# Altium PCB Microphone_Module_PCB_14-8-21.PcbDoc (part 1 of 2)
Units mm, origin at the board's own origin, x right, y up, seen from the top; angles counter-clockwise.
Board outline 220 x 220 mm, 4 copper layers (Top Layer, Layer 3, Layer 4, Bottom Layer), stack 0.683 mm thick; 104 components, 72 nets, 396 pads, 233 vias.
Unrouted connection lines stored in the file: 15.
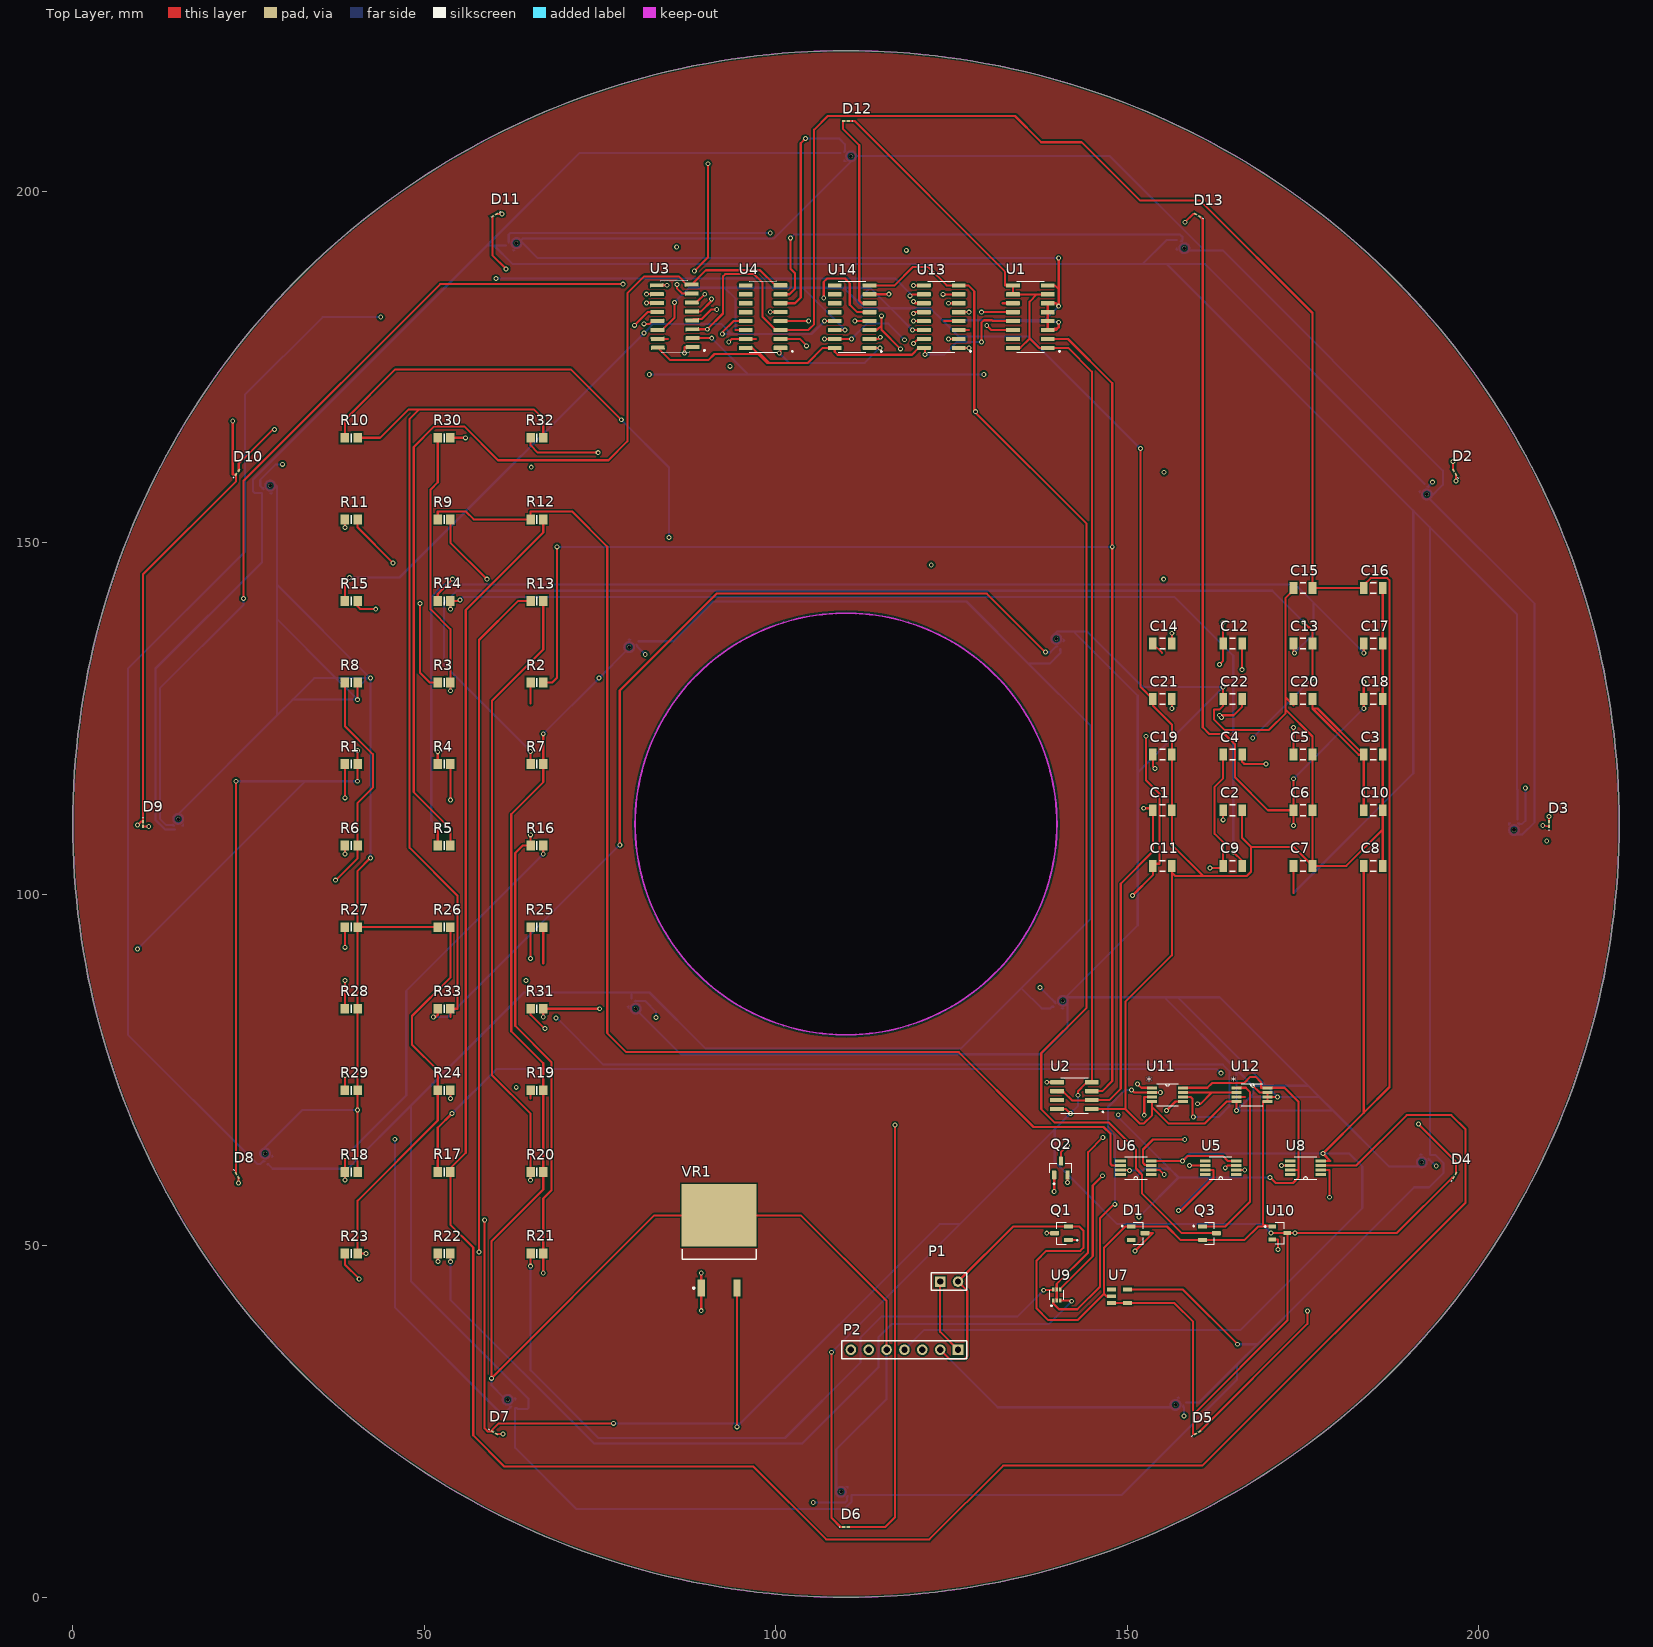
[diagram p0: Top Layer view]
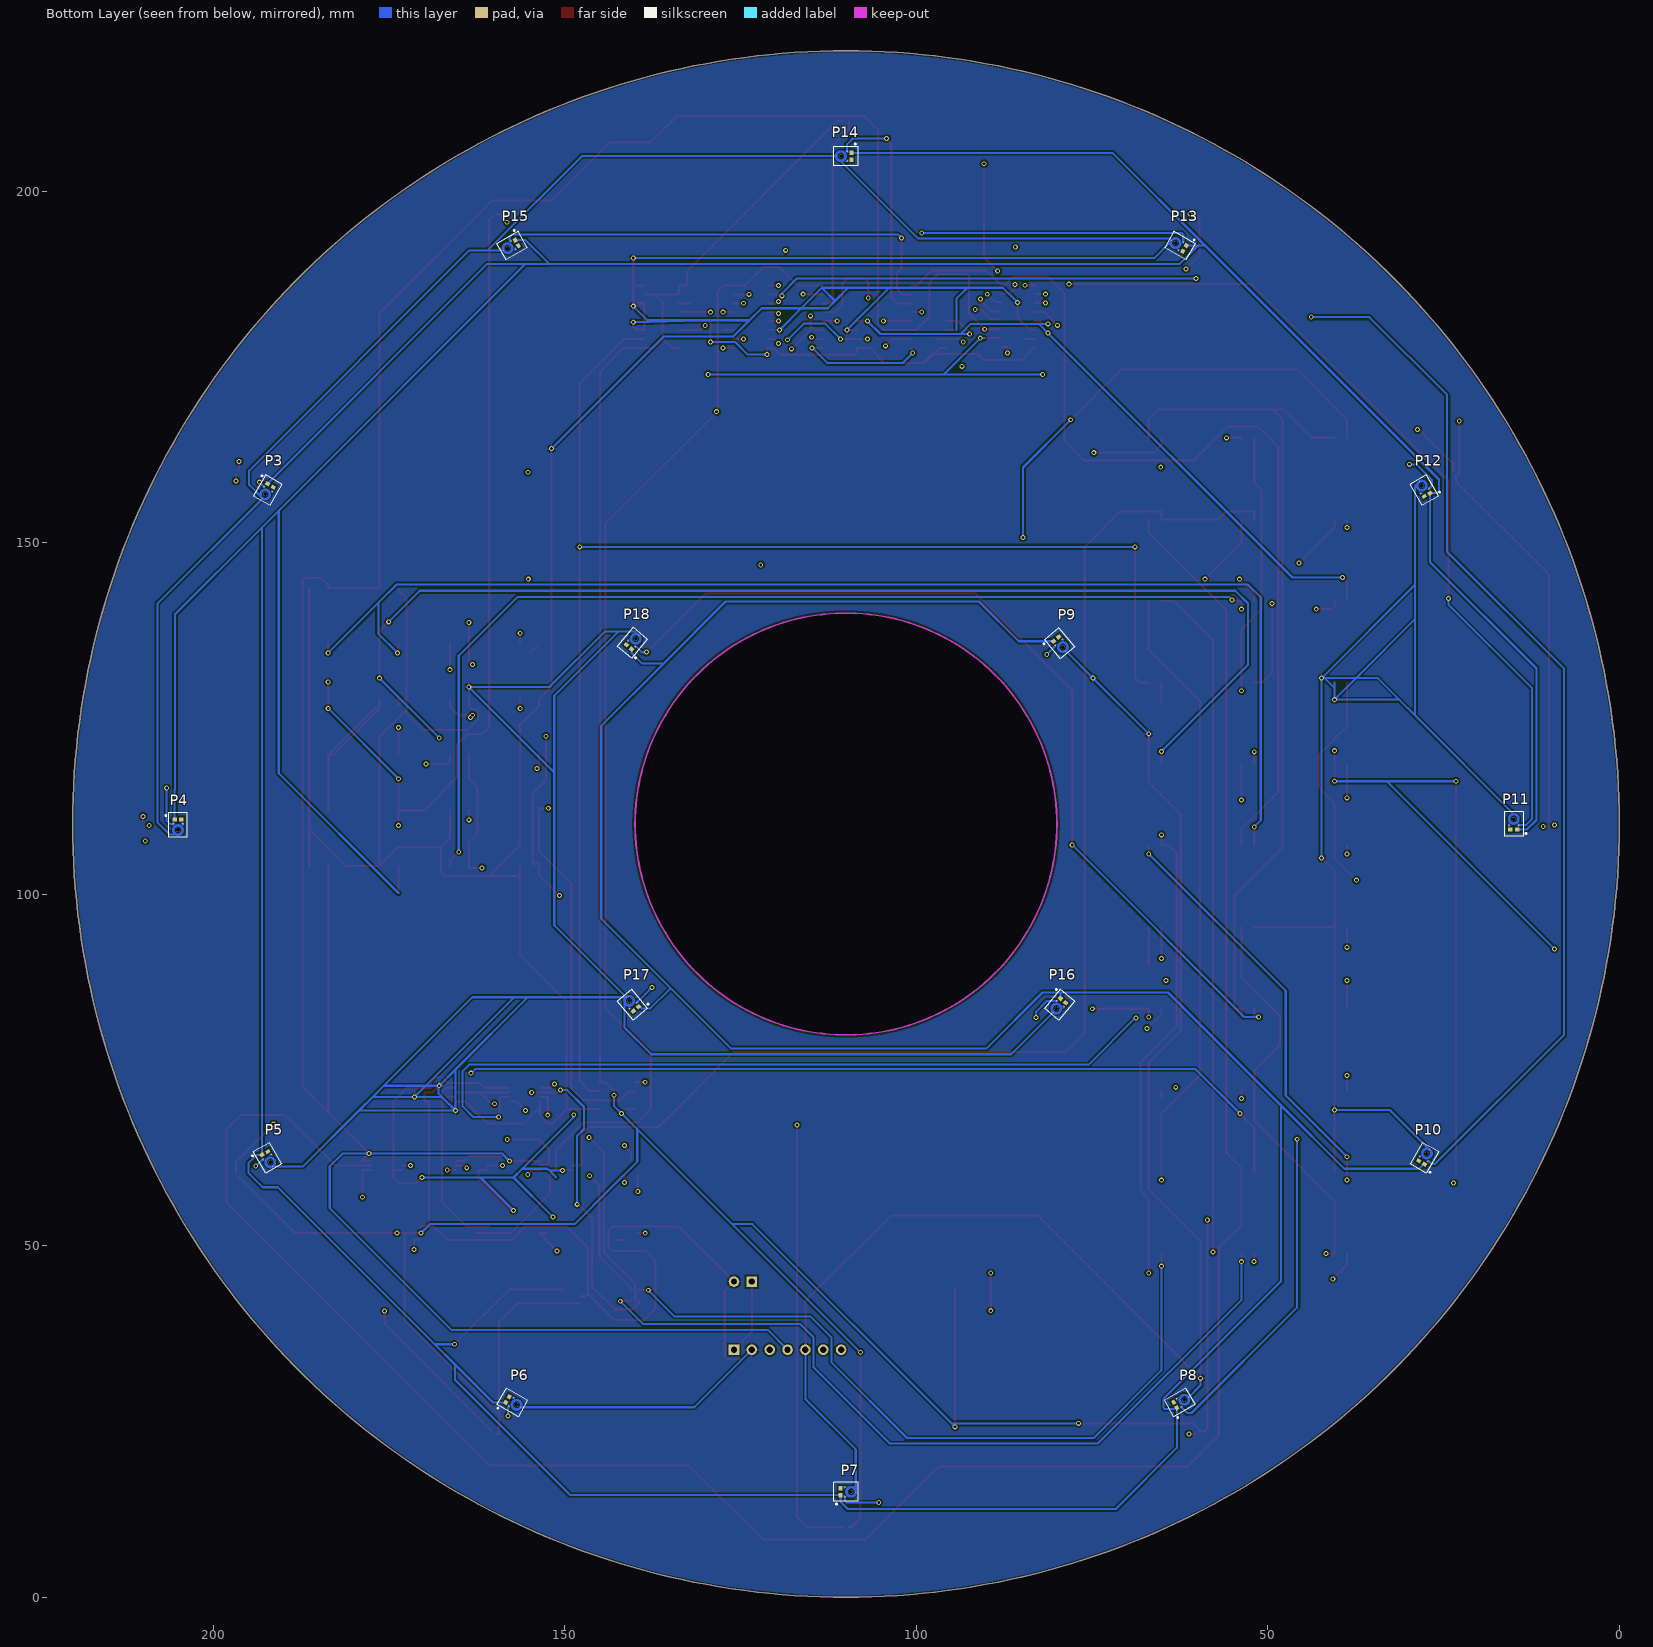
[diagram p1: Bottom Layer view, seen from below]
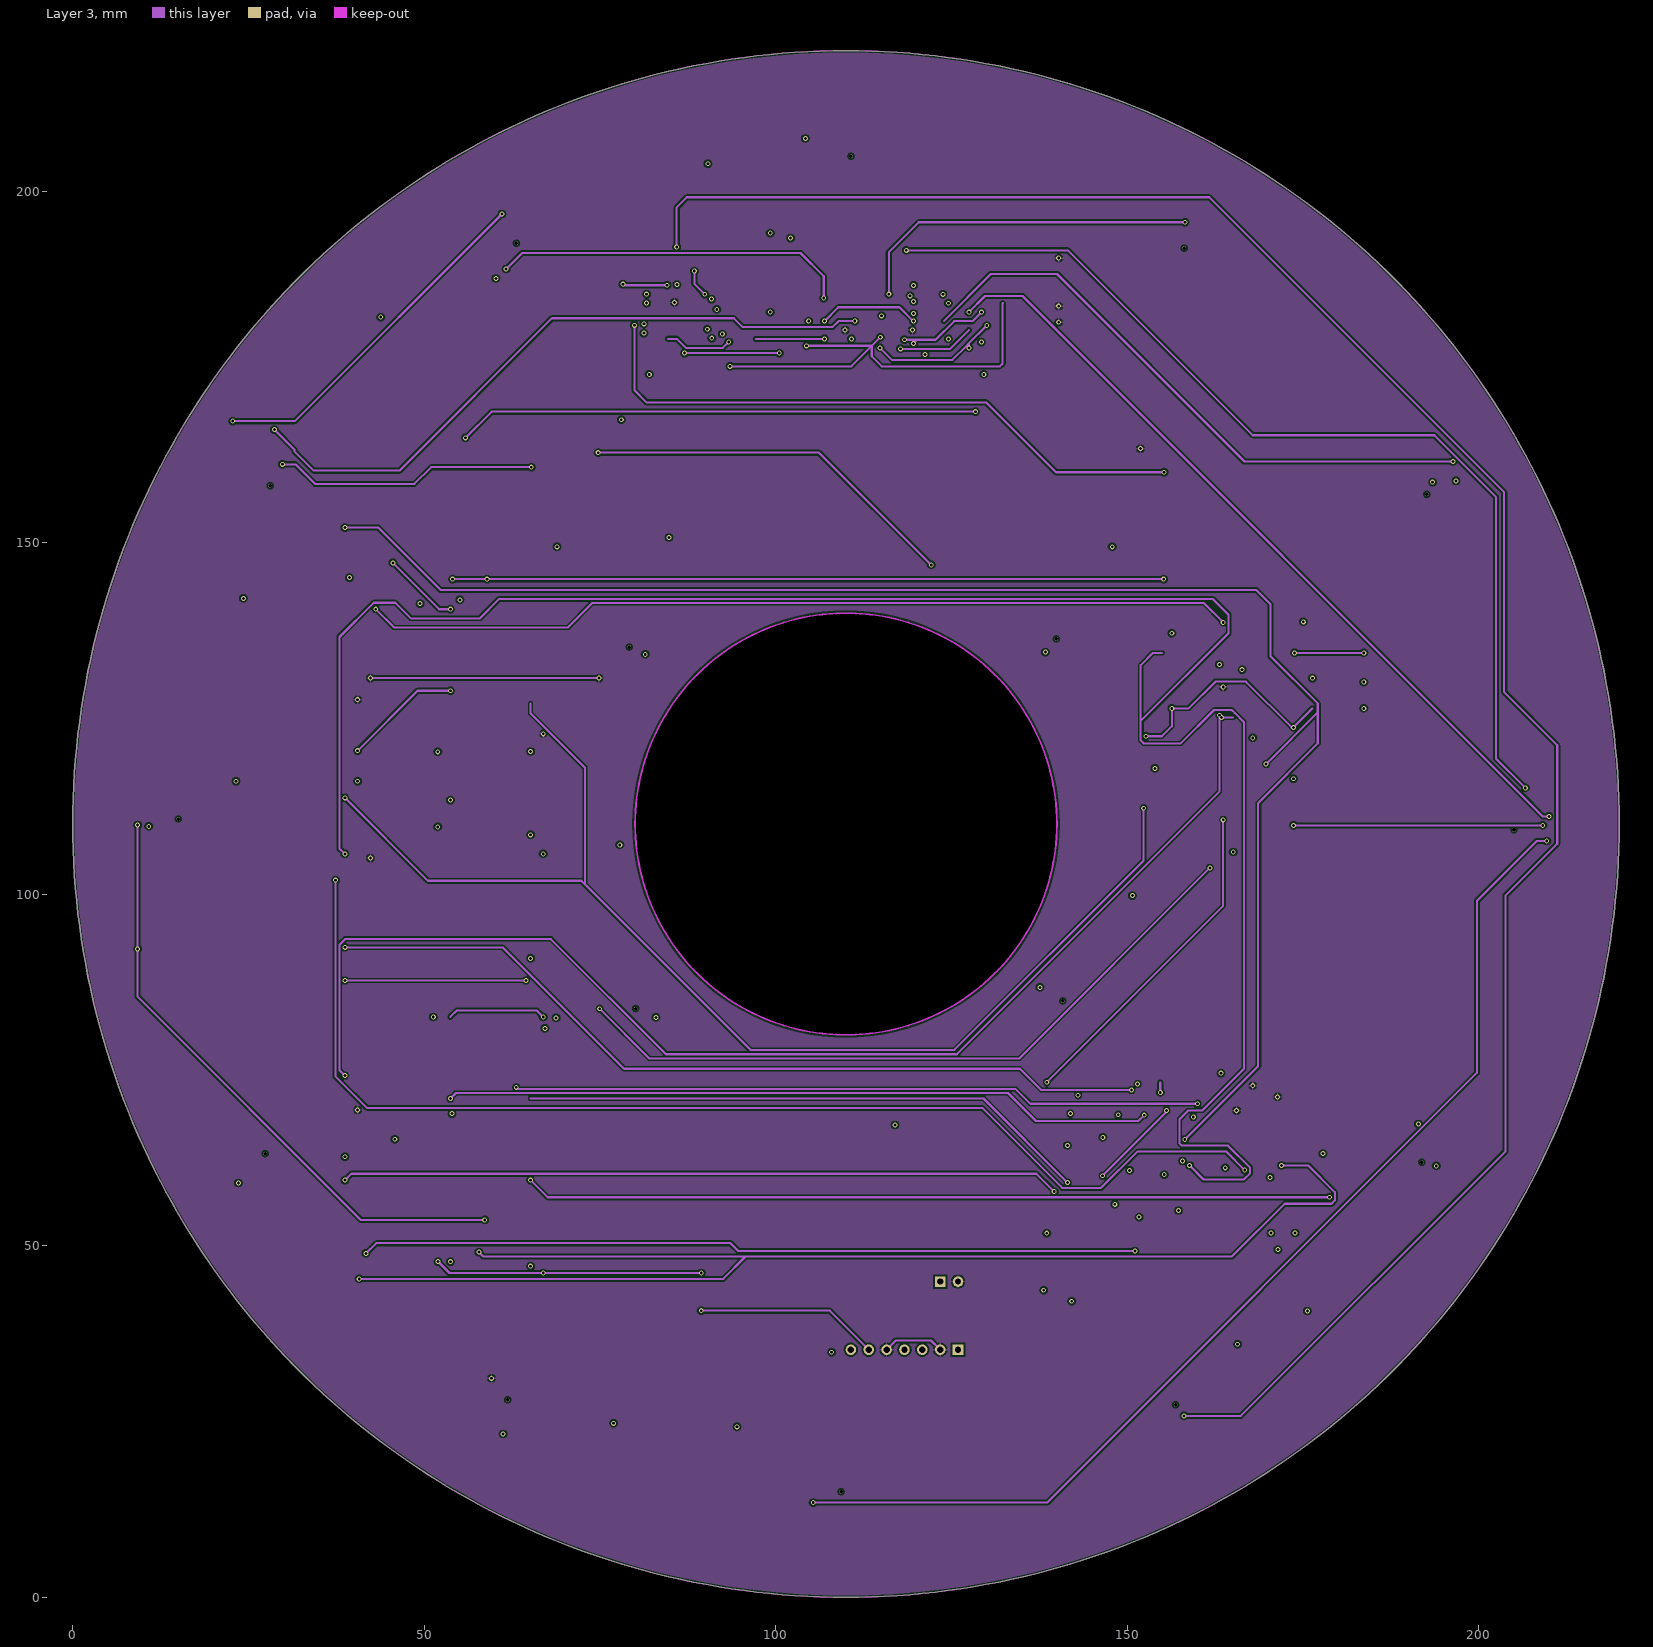
[diagram p2: Layer 3]
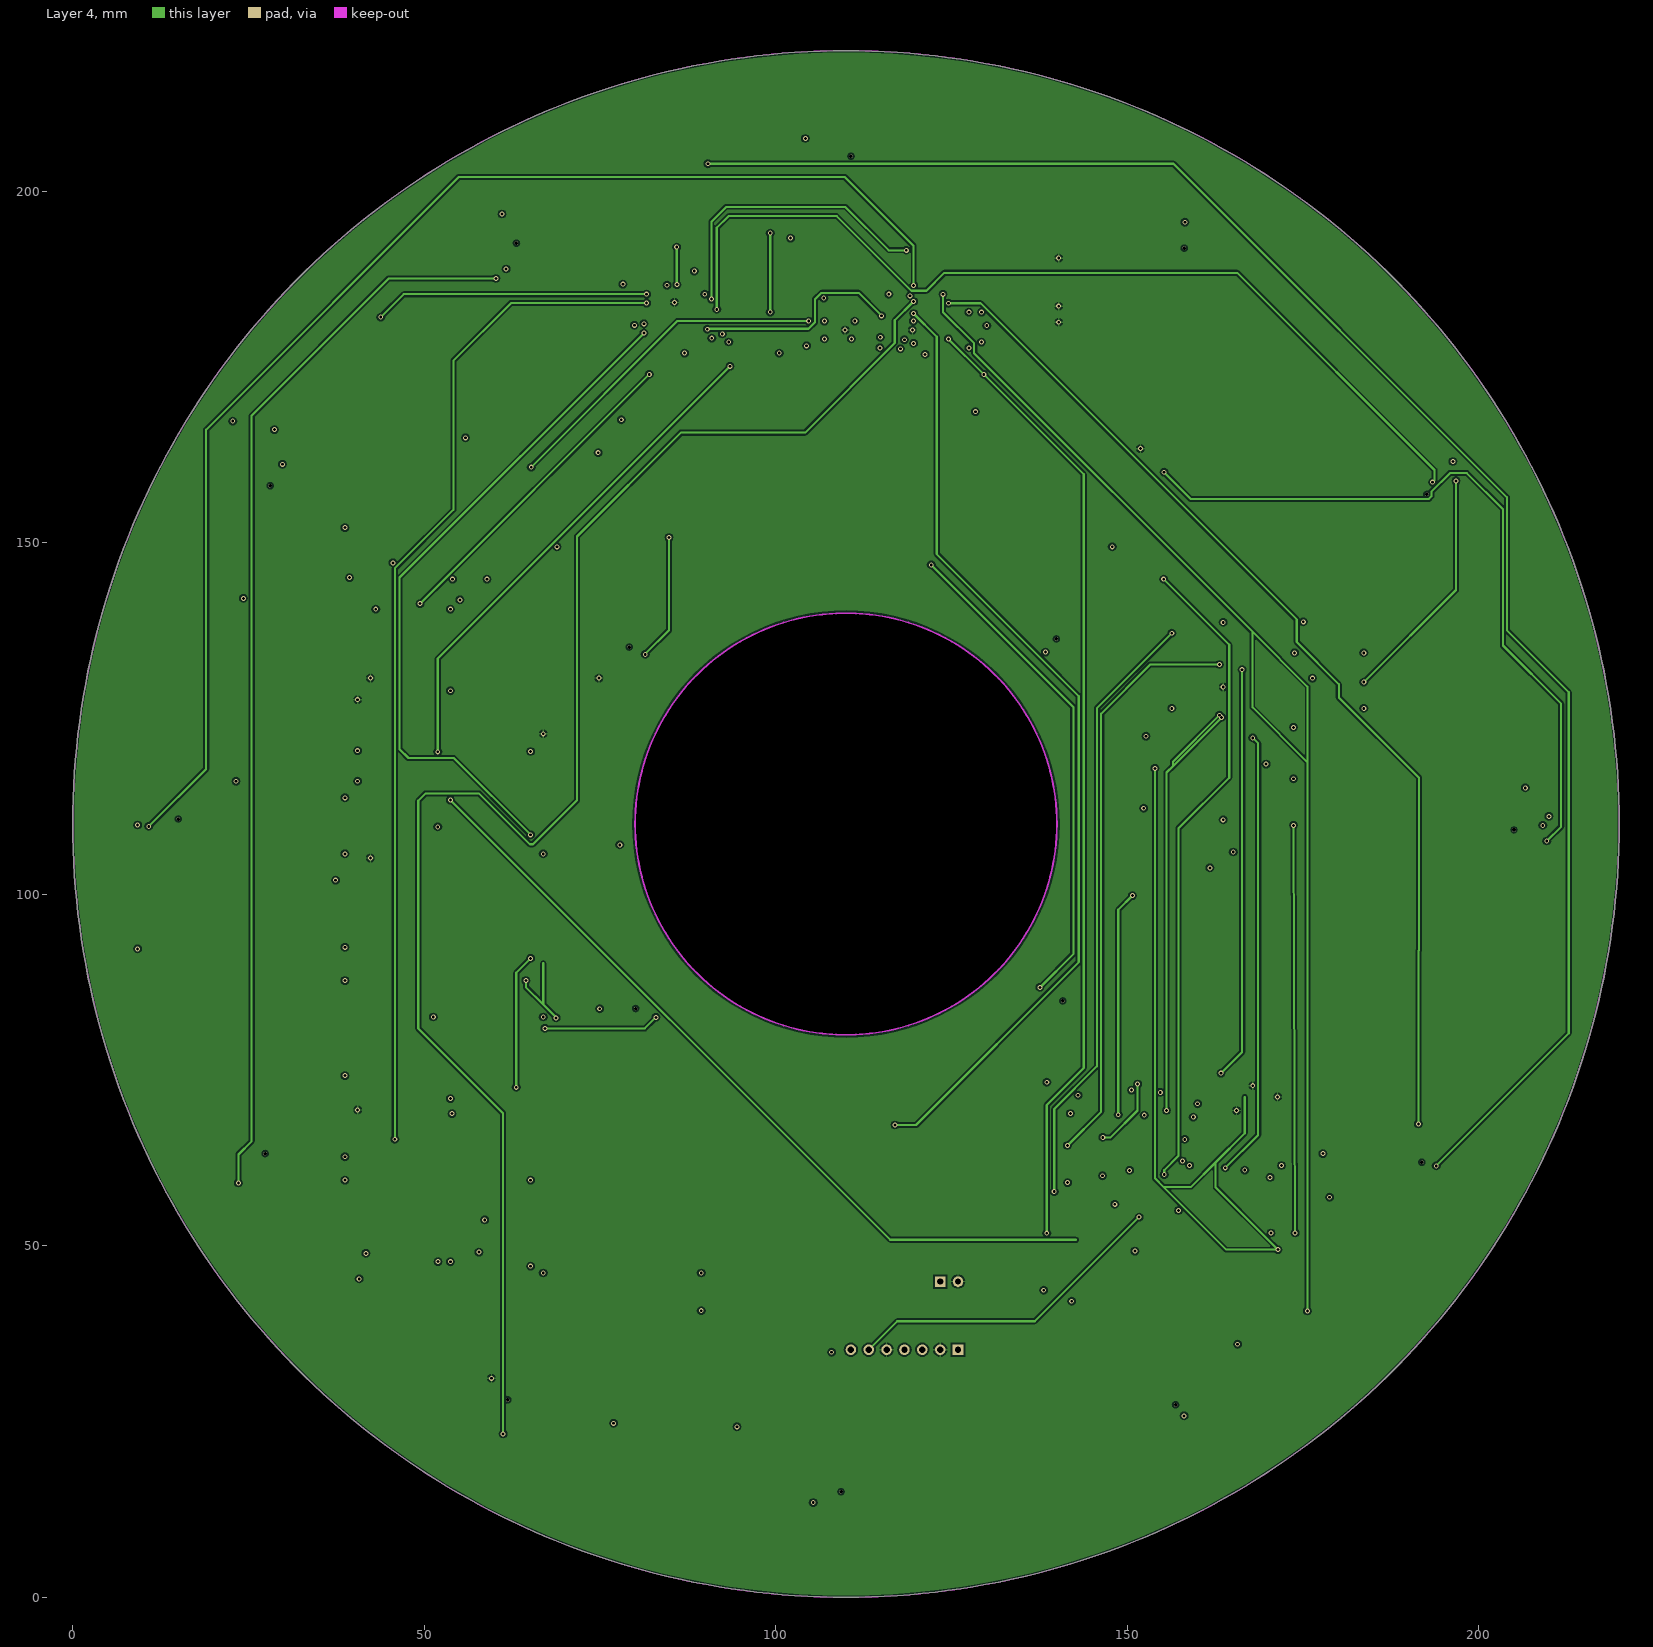
[diagram p3: Layer 4]

## Layer stack, top to bottom
Top Solder: solder mask 0.0102, Solder Resist, Dk 3.5
Top Layer: signal copper 0.0356
Dielectric 2: prepreg 0.0711, PP-006, Dk 4.1
Layer 3: signal copper 0.035
Dielectric 1: dielectric 0.4, FR-4, Dk 4.8
Layer 4: signal copper 0.035
Dielectric 3: prepreg 0.0711, PP-006, Dk 4.1
Bottom Layer: signal copper 0.0356
Bottom Solder: solder mask 0.0102, Solder Resist, Dk 3.5

## Board outline
110,0 cw(c110,110) 0,110 cw(c110,110) 110,220 cw(c110,110) 220,110 cw(c110,110)
cut-out: 110,80 cw(c110,110) 80,110 cw(c110,110) 110,140 cw(c110,110) 140,110 cw(c110,110)

## Design rules (kind name [scope] priority, off if disabled: settings)
Clearance [All] p1: gap=0.25 ignorepadtopadclearanceinfootprint=TRUE
MinimumSolderMaskSliver [All] p1: minsoldermaskwidth=0.05
PolygonConnect [All] p1: connectstyle=Relief reliefconductorwidth=0.254 reliefentries=4 polygonreliefangle="90 Angle" airgapwidth=0.254
RoomDefinition [False vs False] p1: confinementstyle=ConfineIn formatcopy=TRUE lockcomponents=FALSE outline 110,0 cw(c110,110) 0,110 cw(c110,110) 110,220 cw(c110,110) 220,110 cw(c110,110)
RoutingVias [All] p1: holewidth=0.4 width=0.7 viastyle="Through Hole" minholewidth=0.4 minwidth=0.7 maxholewidth=0.4 maxwidth=0.7
SolderMaskExpansion [All] p1: expansion=0.102 istentingtop=FALSE
Width [All] p1: maxlimit=0.5 minlimit=0.3 preferedwidth=0.3
29 further rules are at their usual default settings.

## Components (designator, comment, footprint, x,y, rotation, side; value= is the part's Value field where it differs from the comment)
C1 "100nF" C1206 155.002,111.955 r180 top
C2 "10nF" C1206 165.005,111.955 r180 top value=100nF
C3 "0.1uF" C1206 185.012,119.858 r180 top
C4 "32nF" C1206 165.005,119.858 r180 top
C5 "0.33uF" C1206 175.009,119.858 r180 top
C6 "0.1uF" C1206 175.009,111.955 r180 top
C7 "0.022uF" C1206 175.009,104.052 r180 top value=0.1uF
C8 "0.1uF" C1206 185.012,104.052 r180 top
C9 "6.36nF" C1206 165.005,104.052 r180 top
C10 "0.1uF" C1206 185.012,111.955 r180 top
C11 "0.1uF" C1206 155.002,104.052 r180 top
C12 "1uF" C1206 165.005,135.664 r180 top value=32nF
C13 "32nF" C1206 175.009,135.664 r180 top
C14 "1uF" C1206 155.002,135.664 r180 top value=32nF
C15 "0.1uF" C1206 175.009,143.568 r180 top
C16 "0.1uF" C1206 185.012,143.568 r180 top
C17 "6.36nF" C1206 185.012,135.664 r180 top
C18 "1uF" C1206 185.012,127.761 r180 top value=32nF
C19 "1uF" C1206 155.002,119.858 r180 top value=32nF
C20 "0.1uF" C1206 175.009,127.761 r180 top
C21 "0.1uF" C1206 155.002,127.761 r180 top
C22 "4.7nF" C1206 165.005,127.761 r180 top
D1 "BAT54,215" SOT95P230X110-3N 151.552,51.789 r0 top
D2 "LED2" 0603 196.603,160 r120 top
D3 "LED2" 0603 210,110 r89.23 top
D4 "LED2" 0603 196.603,60 r60 top
D5 "LED2" 0603 160,23.397 r30 top
D6 "LED2" 0603 110,10 r0 top
D7 "LED2" 0603 60,23.397 r330 top
D8 "LED2" 0603 23.397,60 r299.74 top
D9 "LED2" 0603 10,110 r270.23 top
D10 "LED2" 0603 23.408,159.987 r53.07 top
D11 "LED2" 0603 60,196.603 r210 top
D12 "LED2" 0603 110,210 r180 top
D13 "LED2" 0603 160,196.603 r149.83 top
P1 "Supply Input" HDR1X2 123.396,44.907 r0 top
P2 "AM3D-1212DZ" HDR1X7 125.936,35.219 r180 top
P3 "MEMS Sensor" MIC_ICS-43434 192.272,157.5 r210.09 bottom
P4 "MEMS Sensor" MIC_ICS-43434 205.031,109.862 r179.92 bottom
P5 "MEMS Sensor" MIC_ICS-43434 192.272,62.5 r149.91 bottom
P6 "MEMS Sensor" MIC_ICS-43434 157.5,27.728 r119.91 bottom
P7 "MEMS Sensor" MIC_ICS-43434 110,15 r90 bottom
P8 "MEMS Sensor" MIC_ICS-43434 62.5,27.728 r60.09 bottom
P9 "MEMS Sensor" MIC_ICS-43434 79.619,135.712 r140 bottom
P10 "MEMS Sensor" MIC_ICS-43434 27.728,62.5 r30.09 bottom
P11 "MEMS Sensor" MIC_ICS-43434 15,110 r0.01 bottom
P12 "MEMS Sensor" MIC_ICS-43434 27.728,157.5 r329.91 bottom
P13 "MEMS Sensor" MIC_ICS-43434 62.5,192.272 r299.91 bottom
P14 "MEMS Sensor" MIC_ICS-43434 110,205 r270 bottom
P15 "MEMS Sensor" MIC_ICS-43434 157.5,192.272 r240.09 bottom
P16 "MEMS Sensor" MIC_ICS-43434 79.615,84.288 r220 bottom
P17 "MEMS Sensor" MIC_ICS-43434 140.381,84.288 r320 bottom
P18 "MEMS Sensor" MIC_ICS-43434 140.385,135.787 r40.08 bottom
Q1 "MMBT3904" SOT95P230X110-3N 140.652,51.789 r180 top
Q2 "MMBT3904" SOT95P230X110-3N 140.569,61.059 r90 top
Q3 "MMBT3904" SOT95P230X110-3N 161.714,51.789 r0 top
R1 "100K" 6-0805_N 39.622,118.528 r0 top
R2 "750R" 6-0805_N 66.029,130.131 r0 top
R3 "10K" 6-0805_N 52.825,130.131 r0 top
R4 "10K" 6-0805_N 52.825,118.528 r0 top
R5 "1K" 6-0805_N 52.825,106.924 r0 top
R6 "100R" 6-0805_N 39.622,106.924 r0 top
R7 "10K" 6-0805_N 66.029,118.528 r0 top
R8 "1K" 6-0805_N 39.622,130.131 r0 top
R9 "100R" 6-0805_N 52.825,153.337 r0 top
R10 "1K" 6-0805_N 39.622,164.94 r0 top
R11 "10K" 6-0805_N 39.622,153.337 r0 top
R12 "100K" 6-0805_N 66.029,153.337 r0 top
R13 "90K" 6-0805_N 66.029,141.734 r0 top
R14 "1K" 6-0805_N 52.825,141.734 r0 top
R15 "57.6K" 6-0805_N 39.622,141.734 r0 top
R16 "57.6K" 6-0805_N 66.029,106.924 r0 top
R17 "100K" 6-0805_N 52.825,60.512 r0 top
R18 "27K" 6-0805_N 39.622,60.512 r0 top
R19 "57.6K" 6-0805_N 66.029,72.115 r0 top
R20 "1K" 6-0805_N 66.029,60.512 r0 top
R21 "200R" 6-0805_N 66.029,48.908 r0 top
R22 "200R" 6-0805_N 52.825,48.908 r0 top
R23 "10K" 6-0805_N 39.622,48.908 r0 top
R24 "1K" 6-0805_N 52.825,72.115 r0 top
R25 "10K" 6-0805_N 66.029,95.321 r0 top
R26 "10K" 6-0805_N 52.825,95.321 r0 top
R27 "10K" 6-0805_N 39.622,95.321 r180 top
R28 "10K" 6-0805_N 39.622,83.718 r0 top
R29 "10M" 6-0805_N 39.622,72.115 r0 top
R30 "1K" 6-0805_N 52.825,164.94 r0 top
R31 "1K" 6-0805_N 66.029,83.718 r0 top
R32 "1K" 6-0805_N 66.029,164.94 r0 top
R33 "1K" 6-0805_N 52.825,83.718 r0 top
U1 "SN74HC161D" SOIC127P600X175-16N 136.228,182.179 r180 top
U2 "NE555D" SOIC127P599X175-8N 142.497,71.359 r180 top
U3 "DG508ADY" SOIC127P600X175-16N 85.628,182.243 r181.03 top
U4 "DG508ADY" SOIC127P600X175-16N 98.213,182.182 r180.04 top
U5 "OP1177ARMZ-R7" SOP65P490X110-8N 163.304,61.094 r180 top
U6 "OP1177ARMZ-R7" SOP65P490X110-8N 151.233,61.094 r180 top
U7 "LM4120IM5-1.8" SOT95P285X120-5N 148.895,42.815 r0 top
U8 "OP1177ARMZ-R7" SOP65P490X110-8N 175.374,61.094 r180 top
U9 "BCM847BV" SOT50P160X60-6N 139.978,42.994 r90 top
U10 "AP2127N-1.2TRG1" SOT91P240X110-3N 171.726,51.814 r0 top
U11 "LTC6244HMS8#TRPBF" MSOP-8_MS 155.747,71.498 r0 top
U12 "LTC6244HMS8#TRPBF" MSOP-8_MS 167.767,71.498 r0 top
U13 "DG508ADY" SOIC127P600X175-16N 123.555,182.179 r180 top
U14 "DG508ADY" SOIC127P600X175-16N 110.882,182.179 r180 top
VR1 "L7805" D2PAK_N 91.952,50.775 r90 top

## Footprints (in the part's own frame and the unit in brackets; to place one, negate y for a bottom-side part, rotate by r counter-clockwise, add the part's x,y. Pads: shape width x height; smd on the part's side, far side on the other; paste and mask are expansions set on the pad)
6-0805_N [mm] "Chip Resistor, Body 2.0x1.2mm, IPC Medium Density"
  rect 1.2x1.4 smd: 1(-0.9,0) 2(0.9,0)
  silkscreen extent 0,-0.6 0,0.6, body extent -1.07,-0.7 1.07,0.7, height 0.7
0603 [mm] "Chip Inductor, Body 0.6x0.3mm, IPC High Density"
  rect 0.5x0.3 smd: 1(-0.35,0) 2(0.35,0)
  silkscreen extent -0.9,-0.05 -0.9,0.05, body extent -0.33,-0.18 0.33,0.18, height 0.55
C1206 [mm] "Chip Capacitor, Body 3.2x1.6mm, IPC High Density"
  rect 1.1x1.7 smd: 1(-1.35,0) 2(1.35,0)
  silkscreen extent -0.4,-0.75 0.4,0.75, body extent -1.7,-0.9 1.7,0.9, height 1.3
D2PAK_N [mm] "D2-PAK, 4-Leads, Body 8.8x10.4mm, Pitch 2.54mm, Lead Span 15.1mm, IPC Medium Density"
  rect 2.4x1.05 smd: 1(-6.8,2.54) 3(-6.8,-2.54)
  rect 8.9x10.65 smd: 2(3.55,0)
  silkscreen extent -6.92,-5.25 -1.3,5.25, body extent -2.7,-5.28 6.3,5.28, height 4.69
HDR1X2 [mm] "Connector; Header; 2 Position"
  rect 1.5x1.5 hole 0.9: 1(0,0)
  round 1.5 hole 0.9: 2(2.54,0)
  silkscreen extent -1.27,-1.27 3.81,1.27
HDR1X7 [mm] "Connector; Header; 7 Position"
  rect 1.5x1.5 hole 0.9: 1(0,0)
  round 1.5 hole 0.9: 2(2.54,0) 3(5.08,0) 4(7.62,0) 5(10.16,0) 6(12.7,0) 7(15.24,0)
  silkscreen extent -1.27,-1.27 16.51,1.27
MIC_ICS-43434 [mm]
  rect 0.65x0.55 smd paste-1 mask+0.03: 1(-0.475,0.771) 5(0.475,0.771)
  round 0.2 smd mask+0: 2(-0.684,0.156) 4(0.676,0.165)
  rect 0.1x0.1 smd paste-1 mask+0: 3(-0.016,-1.383)
  round 0.5 hole 0.5 unplated mask+0.05: ""(0,-0.709)
  Top Layer region: 0.475,0.187 0.705,-0.043 0.805,-0.043 0.805,0.287 0.475,0.287
  Top Layer region: -0.705,-0.043 -0.475,0.187 -0.475,0.287 -0.805,0.287 -0.805,-0.043
  Top Layer region: 250 vertices and 0 holes, not listed, extent -0.811,-1.546 0.809,0.084
  silkscreen extent -1.84,-1.75 1.33,1.75
MSOP-8_MS [mil]
  rect 55x17 smd: 1(-87,38.39) 2(-87,12.8) 3(-87,-12.79) 4(-87,-38.38) 5(87,-38.38) 6(87,-12.79) 7(87,12.8) 8(87,38.39)
  silkscreen extent -61,-61 61,61, body extent -59,-96 59,96, height 19
SOIC127P599X175-8N [mm]
  rrect25% 1.97x0.6 smd: 1(-2.47,1.905) 2(-2.47,0.635) 3(-2.47,-0.635) 4(-2.47,-1.905) 5(2.47,-1.905) 6(2.47,-0.635) 7(2.47,0.635) 8(2.47,1.905)
  silkscreen extent -4.14,-2.52 1.95,2.52
SOIC127P600X175-16N [mm]
  rrect25% 1.97x0.6 smd: 1(-2.475,4.445) 2(-2.475,3.175) 3(-2.475,1.905) 4(-2.475,0.635) 5(-2.475,-0.635) 6(-2.475,-1.905) 7(-2.475,-3.175) 8(-2.475,-4.445) 9(2.475,-4.445) 10(2.475,-3.175) 11(2.475,-1.905) 12(2.475,-0.635) 13(2.475,0.635) 14(2.475,1.905) 15(2.475,3.175) 16(2.475,4.445)
  silkscreen extent -4.24,-5.07 1.95,5.07
SOP65P490X110-8N [mil]
  rect 59x17 smd: 1(-86,38) 2(-86,13) 3(-86,-13) 4(-86,-38) 5(86,-38) 6(86,-13) 7(86,13) 8(86,38)
  silkscreen extent -63,-63 63,63
SOT50P160X60-6N [mm]
  rect 0.56x0.32 smd: 1(-0.785,0.5) 2(-0.785,0) 3(-0.785,-0.5) 4(0.785,-0.5) 5(0.785,0) 6(0.785,0.5)
  silkscreen extent -1.62,-0.97 0.65,0.97
SOT91P240X110-3N [mm]
  rrect25% 1.09x0.61 smd: 1(-1.07,0.915) 2(-1.07,-0.915) 3(1.07,0)
  silkscreen extent -2.2,-1.54 0.65,1.54, body extent -1.5,-0.5 1.5,0.6, height 1.31
SOT95P230X110-3N [mm]
  rrect25% 1.26x0.59 smd: 1(-0.98,0.95) 2(-0.98,-0.95) 3(0.98,0)
  silkscreen extent -2.35,-1.56 0.7,1.57, body extent -1.15,-1.45 1.15,1.45, height 1.1
SOT95P285X120-5N [mil]
  rect 50x22 smd: 1(-45,38) 2(-45,0) 3(-45,-38) 4(45,-38) 5(45,38)

## Part data
C1 C2 C3 C4 C5 C6 C7 C8 C9 C10 C11 C12 C13 C14 C15 C16 C17 C18 C19 C20 C21 C22: library part "Cap Semi", LatestRevisionDate=29-May-2009, LatestRevisionNote="IPC-7351 Footprint Added.", PackageDescription="Chip Capacitor", PackageReference=C1206, Published=8-Jun-2000, Publisher="Altium Limited"
D1 Q1 Q2 Q3 U9: "No Description Available", Mfr_Name=Nexperia, Copyright="Copyright (C) 2021 Ultra Librarian. All rights reserved.", RefDes=RefDes, Type=DEV
  D1: Manufacturer_Part_Number=BAT54,215
  Q1 Q2 Q3: Manufacturer_Part_Number=MMBT3904
  U9: Manufacturer_Part_Number=BCM847BV
D2 D3 D4 D5 D6 D7 D8 D9 D10 D11 D12 D13: "Typical RED, GREEN, YELLOW, AMBER GaAs LED", LatestRevisionDate=17-Jul-2002, LatestRevisionNote="Re-released for DXP Platform.", PackageDescription="SM LED; 2 Flat Leads", PackageReference=3.2X1.6X1.1, PackageVersion=Feb-2002, Published=8-Jun-2000, Publisher="Altium Limited"
P1: library part "Header 2", "Header, 2-Pin", LatestRevisionDate=17-Jul-2002, LatestRevisionNote="Re-released for DXP Platform.", Publisher="Altium Limited"
P2: library part "Header 7", "3 Watt", LatestRevisionDate=17-Jul-2002, LatestRevisionNote="Re-released for DXP Platform.", Publisher="Altium Limited"
P3 P4 P5 P6 P7 P8 P9 P10 P11 P12 P13 P14 P15 P16 P17 P18: library part "Header 3", "MMICT4076-00-908", LatestRevisionDate=17-Jul-2002, LatestRevisionNote="Re-released for DXP Platform.", Publisher="Altium Limited"
R1 R2 R3 R4 R5 R6 R7 R8 R9 R10 R11 R12 R13 R14 R15 R16 R17 R18 R19 R20 R21 R22 R23 R24 R25 R26 R27 R28 R29 R30 R31 R32 R33: library part Res1, "Resistor", LatestRevisionDate=17-Jul-2002, LatestRevisionNote="Re-released for DXP Platform.", PackageDescription=0805, PackageReference=0805, Published=8-Jun-2000, Publisher="Altium Limited"
U1: "4-Bit Synchronous Binary Counter", Code_IPC=SOIC127P600-16, ComponentLink1Description="Manufacturer Link", ComponentLink1URL=http://www.ti.com/, ComponentLink2Description=Datasheet, ComponentLink2URL=http://www-s.ti.com/sc/ds/sn74hc161.pdf, DatasheetVersion=May-1997, LatestRevisionDate=13-Apr-2006, LatestRevisionNote="IPC-7351 Footprint Added.", PackageDescription="16-Pin Small Outline Integrated Circuit 1.27 mm Pitch", PackageReference=D016, PackageVersion=Jan-1998, Published=8-Jun-2000, Publisher="Altium Limited"
U2: "General-Purpose Single Bipolar Timer", Code_IPC=SOIC127P600-8, Code_JEDEC=MS-012-AA, ComponentLink1Description="Manufacturer Link", ComponentLink1URL=http://www.st.com/, ComponentLink2Description=Datasheet, ComponentLink2URL=http://www.st.com/stonline/products/literature/ds/2182/ne555.pdf, DatasheetVersion=Jul-1998, LatestRevisionDate=13-Apr-2006, LatestRevisionNote="IPC-7351 Footprint Added.", PackageDescription="8-Pin Small Outline Integrated Circuit 1.27 mm Pitch", PackageReference=SO8, PackageVersion=Dec-2002, Published=24-Aug-2001, Publisher="Altium Limited"
U3 U4 U13 U14: "Monolithic CMOS Analog Multiplexer", Code_IPC=SOIC127P600-16, Code_JEDEC=MS-012-AC, ComponentLink1Description="Manufacturer Link", ComponentLink1URL=http://www.maxim-ic.com/, ComponentLink2Description=Datasheet, ComponentLink2URL=http://pdfserv.maxim-ic.com/en/ds/DG508A-DG509A.pdf, DatasheetVersion=Feb-1996, LatestRevisionDate=13-Apr-2006, LatestRevisionNote="IPC-7351 Footprint Added.", PackageDescription="16-Pin Small Outline Integrated Circuit 1.27 mm Pitch", PackageReference=NSO16, Published=16-Jan-2001, Publisher="Altium Limited"
U5 U6 U8: "No Description Available", Mfr_Name="Analog Devices Inc", Copyright="Copyright (C) 2021 Ultra Librarian. All rights reserved.", Digi-Key_Part_Number_1=OP1177ARMZ-R7CT-ND, Digi-Key_Part_Number_2=OP1177ARMZ-R7DKR-ND, Digi-Key_Part_Number_3=OP1177ARMZ-R7TR-ND, Manufacturer_Part_Number=OP1177ARMZ-R7, RefDes=RefDes, Type=DEV
U7: "Precision Micropower Low Dropout Voltage Reference, 5-pin SOT-23", Manufacturer="National Semiconductor", PackageTopMarking=R21B*XTT, PowerWise=Y, Supplier Part Number 1=1312740, ComponentLink1Description="LM4120 Datasheet", ComponentLink1URL=http://www.national.com/ds/LM/LM4120.pdf, ComponentLink2Description="LM4120 Web Page", ComponentLink2URL=http://www.national.com/pf/LM/LM4120.html, ComponentLink3Description="MF05A Package Page", ComponentLink3URL=http://www.national.com/packaging/folders/mf05a.html, CompType="Voltage Reference IC", DatasheetVersion=Mar-2005, PackageDescription="Molded SOT-23, .115 x .063 x .040 in Body, 5 Lead, .0375 in Pitch", PackageReference=MF05A, PackageVersion="revD, Aug-2008", PartNumber=LM4120IM5-1.8, PinCount=5, Published=4-Dec-2008, Publisher="Altium Limited", RoHS=N, Supplier 1=Farnell
U10: library part AP2127N-1.8TRG1, "No Description Available", Mfr_Name="Diodes Inc", Copyright="Copyright (C) 2021 Ultra Librarian. All rights reserved.", Manufacturer_Part_Number=AP2127N-1.8TRG1, RefDes=RefDes, Type=DEV
U11 U12: "No Description Available", Mfr_Name="Analog Devices / Linear Technology", Copyright="Copyright (C) 2021 Ultra Librarian. All rights reserved.", Digi-Key_Part_Number_1=LTC6244HMS8#TRPBFCT-ND, Digi-Key_Part_Number_2=LTC6244HMS8#TRPBFDKR-ND, Digi-Key_Part_Number_3=LTC6244HMS8#TRPBFTR-ND, Manufacturer_Part_Number=LTC6244HMS8#TRPBF, RefDes=RefDes, Type=DEV
VR1: library part "Volt Reg", "Voltage Regulator", LatestRevisionDate=29-May-2009, LatestRevisionNote="IPC-7351 Footprint Added.", PackageDescription="3-Pin Transistor Outline Package 2.54 mm Pitch, 15.1 mm Lead Span", PackageReference=D2PAK, Published=24-Mar-1999, Publisher="Altium Limited"

## Via types
v1: diameter 0.7, hole 0.4, Top Layer to Bottom Layer, 233 vias

## Nets (pads, with @x,y where several pads share a name; then routed paths per layer and width w, separated by ;. In a path a pad name is that pad's centre, name@x,y a point inside that pad or via, vN(x,y) a via of type N, cw(c..) or ccw(c..) an arc to the next point about the centre after c; other vN are vias at no path point)
1: P3.2 U3.4 | length 138.4
  Top Layer w0.3: U3.4@88.114,181.653 88.281,181.819 89.452,181.819 90.835,183.201 v1(91.615,183.201)
  Layer 4 w0.3: v1(91.615,183.201) 91.618,183.204 91.618,194.816 93.281,196.478 108.684,196.478 119.298,185.864 121.45,185.864 123.993,188.407 165.663,188.407 193.714,160.356 193.714,158.896 v1(193.446,158.628)
  Bottom Layer w0.3: P3.2@192.786,157.978 192.796,157.978 v1(193.446,158.628)
2: P4.2 U3.5 | length 193.1
  Top Layer w0.3: U3.5@88.091,182.922 89.391,182.922 90.868,184.4 v1(90.868,184.673)
  Layer 3 w0.3: v1(118.582,191.611) 141.557,191.611 167.866,165.302 193.693,165.302 202.45,156.545 202.45,119.327 v1(206.638,115.139)
  Layer 4 w0.3: v1(90.868,184.673) 90.868,195.686 92.965,197.783 109.901,197.783 116.072,191.611 v1(118.582,191.611)
  Bottom Layer w0.3: P4.2@205.715,110.017 206.192,110.017 206.638,110.463 v1(206.638,115.139)
3: P5.2 U3.6 | length 263.6
  Top Layer w0.3: U3.6@88.069,184.192 88.148,184.271 88.809,184.271 v1(89.905,185.367) ; v1(88.422,188.649) 90.358,190.585 v1(90.358,203.925)
  Layer 3 w0.3: v1(88.422,188.649) 88.422,186.85 v1(89.905,185.367)
  Layer 4 w0.3: v1(90.358,203.925) 156.592,203.925 204.018,156.499 204.018,137.546 212.817,128.747 212.817,80.219 v1(193.964,61.367)
  Bottom Layer w0.3: P5.2@192.943,62.292 193.868,61.367 v1(193.964,61.367)
4: P6.2 U3.7 | length 312.4
  Top Layer w0.3: v1(85.943,186.732) 85.943,186.221 86.702,185.462 U3.7@88.046,185.462
  Layer 3 w0.3: v1(85.912,192.077) 85.912,197.721 87.352,199.161 161.685,199.161 203.633,157.213 203.633,128.754 211.186,121.202 211.186,107.197 203.837,99.848 203.837,63.46 166.171,25.793 v1(158.088,25.793)
  Layer 4 w0.3: v1(85.912,192.077) 85.928,192.062 85.928,186.748 v1(85.943,186.732)
  Bottom Layer w0.3: P6.2@157.976,27.212 157.976,27.068 158.088,26.957 v1(158.088,25.793)
5: P7.2 U3.12 | length 361.9
  Top Layer w0.3: v1(79.905,180.942) 81.796,182.833 U3.12@83.142,182.833
  Layer 3 w0.3: v1(79.905,180.942) 79.905,171.689 81.606,169.988 129.925,169.988 139.874,160.039 v1(155.245,160.039) ; v1(105.343,13.472) 138.633,13.472 199.748,74.587 199.748,99.055 208.271,107.578 v1(209.683,107.578)
  Layer 4 w0.3: v1(155.245,160.039) 159.047,156.237 192.897,156.237 193.278,156.617 193.278,157.283 195.917,159.922 198.331,159.922 203.468,154.785 203.468,135.395 211.735,127.127 211.735,109.63 v1(209.683,107.578)
  Bottom Layer w0.3: v1(105.343,13.472) 109.909,13.472 110.141,13.704 110.141,14.149 110.156,14.164 P7.2@110.156,14.316
6: P8.2 U3.11 | length 193.6
  Top Layer w0.3: v1(81.629,184.103) 81.672,184.146 83.077,184.146 U3.11@83.119,184.103
  Layer 4 w0.3: v1(45.814,65.154) 45.814,146.363 54.15,154.699 54.15,175.918 62.336,184.103 v1(81.629,184.103)
  Bottom Layer w0.3: v1(45.814,65.154) 45.814,41.248 60.851,26.211 61.448,26.211 P8.2@62.294,27.057
7: P10.2 U3.10 | length 189.6
  Top Layer w0.3: v1(81.629,185.373) U3.10@83.096,185.373
  Layer 4 w0.3: v1(43.814,182.104) 47.082,185.373 v1(81.629,185.373)
  Bottom Layer w0.3: P10.2@27.214,62.022 27.071,62.022 26.701,61.653 26.209,61.653 7.847,80.014 7.847,132.065 24.48,148.698 24.48,171.047 35.537,182.104 v1(43.814,182.104)
8: P11.2 U3.9 | length 128.6
  Top Layer w0.3: v1(24.28,142.086) 24.28,158.821 52.255,186.797 v1(78.265,186.797) ; U3.9@83.074,186.642 v1(84.541,186.642)
  Layer 3 w0.3: v1(78.265,186.797) 78.419,186.642 v1(84.541,186.642)
  Bottom Layer w0.3: 14.195,109.878 14.13,109.878 14.123,109.885 13.241,109.885 12.389,110.737 12.389,129.297 24.28,141.188 v1(24.28,142.086)
9: P12.2 U4.4 | length 95.1
  Top Layer w0.3: U4.4@100.689,181.549 v1(104.691,181.549)
  Layer 3 w0.3: v1(29.831,161.167) 31.677,161.167 34.466,158.379 48.597,158.379 50.981,160.763 v1(65.22,160.763)
  Layer 4 w0.3: v1(65.22,160.763) 86.007,181.549 v1(104.691,181.549)
  Bottom Layer w0.3: P12.2@27.057,157.708 26.678,158.087 26.678,158.963 28.883,161.167 v1(29.831,161.167)
10: P13.2 U4.5 | length 51.2
  Top Layer w0.3: v1(99.226,182.819) U4.5@100.688,182.819
  Layer 4 w0.3: v1(99.226,182.819) v1@99.226,182.898 ; v1(99.226,194.057) v1@99.226,182.898 ; v1@99.315,182.809 v1@99.226,182.898
  Bottom Layer w0.3: P13.2@62.024,192.788 62.024,193.839 62.241,194.057 v1(99.226,194.057)
11: P14.2 U4.6 | length 33.1
  Top Layer w0.3: U4.6@100.687,184.089 102.744,184.089 103.558,184.903 103.558,206.862 v1(104.217,207.521)
  Bottom Layer w0.3: v1(104.217,207.521) 109.046,207.521 109.844,206.723 P14.2@109.844,205.684
12: P15.2 U4.7 | length 66.6
  Top Layer w0.3: U4.7@100.686,185.359 101.955,185.359 102.74,186.144 102.74,188.351 102.11,188.982 v1(102.11,193.356)
  Bottom Layer w0.3: v1(102.11,193.356) 102.641,193.887 157.484,193.887 157.869,193.503 157.869,193.106 P15.2@157.706,192.943
+1.8: C7.2 P3.1 P4.1 P5.1 P6.1 P7.1 P8.1 P9.1 P10.1 P11.1 P12.1 P13.1 P14.1 P15.1 P16.1 P17.1 P18.1 U7.5 | length 1074.3
  Top Layer w0.3: U7.5@150.038,43.78 157.921,43.78 v1(165.71,35.992) ; 173.659,100.179 C7.2@173.659,104.052
  Bottom Layer w0.3: P11.1@14.525,109.229 13.12,109.229 11.773,110.575 11.773,132.118 26.93,147.275 P12.1@26.93,157.071 25.93,157.071 25.642,157.359 25.642,159.017 58.924,192.3 ; P10.1@27.703,61.595 27.813,61.595 28.453,60.955 39.111,60.955 48.108,69.952 ; P13.1@61.595,192.3 59.922,192.3 ; P16.1@79.483,85.184 79.483,86.03 ; P9.1@80.478,135.997 85.425,135.997 91.078,141.65 127.133,141.65 135.964,132.819 ; P14.1@109.229,205.475 72.1,205.475 58.924,192.3 ; 134.946,86.654 137.831,83.769 139.07,83.769 139.306,84.004 P17.1@139.522,84.003 ; P18.1@140.518,134.891 140.486,134.859 140.486,134.644 140.518,134.612 140.518,134.337 138.999,132.819 135.964,132.819 ; P15.1@157.069,193.069 155.6,193.069 152.219,189.687 ; P6.1@158.405,27.7 160.212,27.7 165.623,33.111 ; v1(165.71,35.992) 168.504,35.992 ; 173.659,100.179 173.66,100.178 190.703,117.221 190.703,154.584 ; P3.1@192.297,158.405 161.015,189.687 155.6,189.687 ; P4.1@205.507,110.633 205.507,114.902 205.484,114.925 205.484,139.804 193.07,152.218 ; 48.108,69.952 64.186,86.03 79.483,86.03 ; 48.108,69.952 48.108,44.933 64.845,28.195 64.845,26.953 64.669,26.778 63.303,26.778 63.149,26.931 P8.1@62.931,26.931 62.931,21.257 71.645,12.543 109.758,12.543 110.771,13.556 P7.1@110.771,14.525 149.189,14.525 165.623,30.959 165.623,33.111 ; 58.924,192.3 59.922,192.3 ; 59.922,192.3 62.535,189.687 152.219,189.687 ; 79.483,86.03 82.042,86.03 90.03,78.042 126.327,78.042 134.942,86.657 144.815,96.53 144.815,123.967 135.964,132.819 ; 152.219,189.687 155.6,189.687 ; 155.6,189.687 190.703,154.584 ; 165.623,33.111 168.504,35.992 ; 168.504,35.992 190.83,58.318 192.96,58.318 195.019,60.377 195.019,61.722 193.812,62.929 P5.1@193.07,62.929 193.07,152.218 ; 190.703,154.584 193.07,152.218
+5: C6.2 C18.2 D2.1 D3.1 D4.1 D5.1 D6.1 D7.1 D8.1 D9.1 D10.1 D11.1 D12.1 D13.1 R1.2 R3.2 R30.1 U1.1 U1.7 U1.9 U1.10 U1.16 U2.4 U2.8 U7.3 U7.4 U10.3 VR1.3 | length 1118.3
  Top Layer w0.3: v1(9.22,109.855) 9.703,110.338 9.999,110.338 D9.1@9.999,110.35 9.999,145.508 23.198,158.707 D10.1@23.198,159.707 22.758,159.707 v1(22.758,167.31) ; D8.1@23.224,60.304 v1(23.224,116.078) ; v1(40.522,116.078) R1.2@40.522,118.528 v1(40.522,120.433) ; R30.1@51.925,164.94 51.925,158.605 50.902,157.582 50.902,140.538 53.725,137.714 R3.2@53.725,130.131 v1(53.725,128.956) ; v1(58.598,53.67) 58.598,24.03 59.055,23.572 D7.1@59.697,23.572 59.697,23.812 60.624,24.74 v1(76.937,24.74) ; D11.1@60.303,196.778 v1(61.062,196.778) ; v1(94.492,24.247) VR1.3@94.492,43.975 ; v1(107.95,34.849) 107.95,11.27 109.22,10 D6.1@109.65,10 ; D12.1@110.35,210 111.227,210 132.639,188.588 132.639,186.624 U1.9@133.753,186.624 U1.10@133.753,185.354 137.16,185.354 ; U1.16@133.753,177.734 134.783,177.734 136.119,179.07 ; U1.7@138.703,185.354 137.16,185.354 ; U2.8@140.027,69.454 141.285,69.454 v1(141.92,68.819) ; v1(143.025,71.413) 143.025,72.007 144.132,73.114 144.282,73.264 144.983,73.264 144.983,174.356 141.605,177.734 U1.1@138.703,177.734 137.454,177.734 136.119,179.07 ; U7.3@147.752,41.85 U7.4@150.038,41.85 156.718,41.85 159.385,39.183 159.385,25.959 ; D5.1@159.697,23.222 159.385,23.222 159.385,25.959 ; D13.1@160.303,196.427 160.757,195.973 160.757,123.75 161.695,122.812 163.853,122.812 165.354,121.31 165.354,116.611 170.011,111.955 C6.2@173.659,111.955 ; v1(170.459,51.814) U10.3@172.796,51.814 ; v1(173.659,109.804) C6.2@173.659,111.955 ; v1(173.659,116.438) C6.2@173.659,111.955 ; v1(183.662,126.441) C18.2@183.662,127.761 v1(183.662,130.181) ; D4.1@196.428,59.697 196.222,59.697 188.339,51.814 v1(173.887,51.814) U10.3@172.796,51.814 ; v1(196.778,158.801) D2.1@196.778,159.697 ; v1(209.118,109.804) D3.1@209.995,109.65 ; 136.119,179.07 136.119,184.313 137.16,185.354 ; 159.385,25.959 172.796,39.369 U10.3@172.796,51.814
  Layer 3 w0.3: v1(9.22,109.855) v1(9.22,92.227) 9.22,85.435 40.985,53.67 v1(58.598,53.67) ; v1(22.758,167.31) 31.594,167.31 v1(61.062,196.778) ; v1(40.522,120.433) 49.045,128.956 v1(53.725,128.956) ; v1(173.659,109.804) v1(209.118,109.804)
  Layer 4 w0.3: v1(173.659,109.804) v1(173.887,51.814) ; v1(183.662,130.181) 196.778,143.296 v1(196.778,158.801)
  Bottom Layer w0.3: v1(9.22,92.227) 33.071,116.078 ; v1(23.224,116.078) 33.071,116.078 ; v1(40.522,116.078) 33.071,116.078 ; v1(76.937,24.74) 94.492,24.74 94.985,24.74 ; v1(94.492,24.247) 94.985,24.74 ; v1(107.95,34.849) 126.186,53.084 ; v1(143.025,71.413) 143.025,69.924 v1(141.92,68.819) 139.7,66.599 ; v1(170.459,51.814) 169.189,53.084 148.59,53.084 143.51,58.164 139.7,61.974 139.7,66.599 ; v1(173.659,116.438) v1(183.662,126.441) ; 94.985,24.74 123.33,53.084 126.186,53.084 ; 126.186,53.084 139.7,66.599
+12: C3.2 C5.2 C10.2 C11.2 C20.1 C21.1 P2.6 R15.1 R16.1 R21.2 R22.1 U3.13 U4.13 U5.7 U6.7 U8.7 U11.8 U12.8 U13.13 U14.13 VR1.1 | length 612.2
  Top Layer w0.3: R15.1@38.722,141.734 38.722,144.412 v1(39.37,145.059) ; v1@51.925,47.751 R22.1@51.925,48.908 ; v1(65.129,108.458) R16.1@65.129,106.924 63.983,106.924 62.941,105.883 62.941,81.28 68.097,76.124 68.097,57.887 66.929,56.718 R21.2@66.929,48.908 v1(66.929,46.126) ; v1(81.255,181.153) 82.067,181.153 82.478,181.563 U3.13@83.165,181.563 ; v1(89.412,40.767) VR1.1@89.412,43.975 v1(89.412,46.126) ; v1(92.405,179.705) 92.405,179.959 93.991,181.545 U4.13@95.739,181.545 ; v1(106.934,181.544) U14.13@108.407,181.544 ; v1(119.587,181.544) U13.13@121.08,181.544 ; U6.7@149.049,60.764 150.306,60.764 v1(150.351,60.719) ; v1(150.749,99.822) 153.652,102.725 C11.2@153.652,104.052 153.652,104.343 154.61,104.343 154.61,114.275 152.679,116.205 v1(152.679,122.479) ; C21.1@156.352,127.761 v1(156.352,126.441) v1@156.362,126.441 ; v1(157.302,55.016) 157.658,55.016 162.281,59.639 162.281,60.764 U5.7@161.119,60.764 ; U11.8@157.957,72.473 161.392,72.473 162.083,73.164 166.651,73.164 167.511,74.023 168.275,74.023 169.039,73.259 169.039,72.473 U12.8@169.977,72.473 172.39,72.473 174.346,70.517 174.346,60.764 ; v1(170.332,59.715) 171.12,58.928 173.584,58.928 174.346,59.69 174.346,60.764 ; U8.7@173.19,60.764 174.346,60.764 ; v1@173.388,123.741 v1(173.659,123.741) C5.2@173.659,119.858 ; C20.1@176.359,127.761 176.359,126.435 ; C10.2@183.662,111.955 C3.2@183.662,119.858 ; 176.359,126.435 177.085,126.435 C3.2@183.662,119.858 ; 176.359,126.435 182.935,119.858 C3.2@183.662,119.858
  Layer 3 w0.3: v1(51.96,47.752) 53.586,46.126 v1(66.929,46.126) v1(89.412,46.126) ; v1(89.412,40.767) 107.688,40.767 P2.6@113.236,35.219 ; v1(106.934,181.544) 108.905,183.515 117.617,183.515 v1(119.587,181.544) ; v1(152.679,122.479) 154.94,122.479 156.362,123.901 v1@156.362,126.441 ; v1(156.352,126.441) v1@156.362,126.441 ; v1@173.388,123.741 166.878,130.251 162.56,130.251 158.75,126.441 v1@156.362,126.441 ; v1(173.659,123.741) 176.352,126.435 176.359,126.435
  Layer 4 w0.3: v1(65.129,108.458) 54.207,119.38 47.752,119.38 46.482,120.65 46.482,145.059 v1(81.255,179.832) ; P2.6@113.236,35.219 117.285,39.268 136.855,39.268 151.659,54.073 v1(151.704,54.073) ; v1(148.73,68.634) 148.73,97.803 v1(150.749,99.822)
  Bottom Layer w0.3: v1(39.37,145.059) 46.482,145.059 v1(81.255,179.832) 82.575,181.153 ; v1(81.255,181.153) 82.575,181.153 ; v1(92.405,179.705) 93.675,179.705 ; v1(106.934,181.544) 105.095,179.705 93.675,179.705 ; v1(148.73,68.634) 148.807,68.557 148.807,68.205 156.052,60.96 ; v1(150.351,60.719) 152.235,60.719 ; 151.232,59.715 152.235,60.719 ; v1(151.704,54.073) 151.704,54.117 157.302,59.715 ; v1(157.302,55.016) 162.001,59.715 ; v1(170.332,59.715) 162.001,59.715 ; 82.575,181.153 92.227,181.153 93.675,179.705 ; 152.235,60.719 152.476,60.96 156.058,60.96 157.302,59.715 ; 157.302,59.715 162.001,59.715
-12: C8.2 C15.1 C16.2 P2.4 U3.3 U4.3 U5.4 U6.4 U8.4 U13.3 U14.3 | length 484.8
  Top Layer w0.3: U3.3@88.137,180.383 v1(90.272,180.383) 92.51,182.621 92.51,187.93 92.806,188.227 96.914,188.227 98.095,187.046 98.095,182.189 100.005,180.279 U4.3@100.69,180.279 104.625,180.279 105.461,181.115 105.461,208.763 107.417,210.718 134.05,210.718 137.473,207.296 137.775,206.993 143.521,206.993 151.842,198.672 160.382,198.672 176.359,182.696 C15.1@176.359,143.568 182.956,143.568 182.963,143.561 183.662,143.561 C16.2@183.662,143.568 183.662,144.018 184.627,144.983 187.007,144.983 187.325,144.666 187.325,72.593 183.662,68.93 ; U14.3@113.357,180.274 114.361,180.274 115.062,180.975 ; v1(115.062,182.296) 115.062,180.975 ; v1(117.74,177.597) 115.062,180.274 115.062,180.975 ; U13.3@126.03,180.274 127.472,180.274 127.483,180.264 ; U6.4@153.418,62.06 v1(157.868,62.06) 158.598,62.789 163.583,62.789 164.313,62.06 U5.4@165.488,62.06 ; U8.4@177.559,62.06 178.91,62.06 v1(177.851,63.119) 183.662,68.93 ; C8.2@183.662,104.052 183.662,68.93
  Layer 3 w0.3: v1(117.74,177.597) 124.816,177.597 127.483,180.264
  Layer 4 w0.3: v1(90.272,180.383) 90.344,180.455 104.658,180.455 105.592,181.389 105.592,184.631 106.522,185.56 111.797,185.56 v1(115.062,182.296)
  Bottom Layer w0.3: P2.4@118.316,35.219 121.14,38.043 166.135,38.043 183.439,55.347 183.439,61.29 181.61,63.119 v1(177.851,63.119) 158.928,63.119 v1(157.868,62.06)
A: P9.2 R10.1 | length 87.4
  Top Layer w0.3: R10.1@38.722,164.94 38.722,167.511 45.888,174.677 70.866,174.677 v1(78.036,167.507)
  Layer 4 w0.3: v1(81.445,134.12) 81.445,134.207 84.822,137.584 v1(84.822,150.758)
  Bottom Layer w0.3: v1(78.036,167.507) 84.822,160.721 v1(84.822,150.758) ; P9.2@80.243,135.391 80.243,135.322 v1(81.445,134.12) 81.445,134.315 v1@81.457,134.327
A0: U1.14 U3.1 U4.1 U13.1 U14.1 | length 57.7
  Top Layer w0.3: v1(87.037,176.987) 87.037,177.843 U3.1@88.183,177.843 ; v1@100.692,176.803 U4.1@100.692,177.739 ; U14.1@113.357,177.734 v1(114.819,177.734) ; U13.1@126.03,177.734 v1(127.483,177.734) ; v1(130.023,180.909) 130.658,180.274 U1.14@133.753,180.274
  Layer 3 w0.3: v1(87.037,176.987) v1(100.508,176.987) ; v1(114.819,177.734) 116.532,176.022 125.135,176.022 127.165,178.052 127.483,178.369 ; v1(127.483,177.734) 127.483,178.369 ; v1(130.023,180.909) 127.483,178.369
  Bottom Layer w0.3: v1(100.508,176.987) 100.692,176.803 101.894,175.601 112.685,175.601 v1(114.819,177.734)
A1: U1.13 U3.16 U4.16 U13.16 U14.16 | length 63
  Top Layer w0.3: U3.16@83.234,177.754 84.991,175.997 90.424,175.997 91.288,176.86 97.536,176.86 ; U4.16@95.742,177.735 96.661,177.735 97.536,176.86 ; v1(121.26,176.809) 121.26,177.734 U13.16@121.08,177.734 120.368,177.734 119.392,176.759 108.814,176.759 108.407,177.165 U14.16@108.407,177.734 106.705,177.734 104.561,175.59 99.06,175.59 ; v1(129.261,178.562) 129.261,181.292 129.629,181.661 130.785,181.661 130.901,181.544 U1.13@133.753,181.544 ; 97.536,176.86 97.79,176.86 99.06,175.59 ; 97.536,176.86 98.806,175.59 99.06,175.59
  Bottom Layer w0.3: v1(121.26,176.809) 124.028,176.809 125.781,178.562 v1(129.261,178.562)
A2: U1.12 U3.15 U4.15 U13.15 U14.15 | length 57.5
  Top Layer w0.3: U3.15@83.211,179.024 84.654,179.024 ; v1(93.32,178.57) 93.755,179.005 U4.15@95.741,179.005 97.194,179.005 ; v1(106.934,179.004) U14.15@108.407,179.004 v1(110.769,179.004) ; v1(119.618,178.369) 120.253,179.004 U13.15@121.08,179.004 ; v1(129.273,182.814) U1.12@133.753,182.814
  Layer 3 w0.3: 84.654,179.024 85.924,179.024 87.219,177.728 92.477,177.728 v1(93.32,178.57) ; 97.195,179.004 v1(106.934,179.004) ; v1(118.309,178.889) 120.138,178.889 ; v1(119.618,178.369) 120.138,178.889 ; v1(129.273,182.814) 127.992,181.534 125.374,181.534 122.73,178.889 120.138,178.889
  Bottom Layer w0.3: v1(110.769,179.004) 112.943,181.178 116.02,181.178 v1(118.309,178.889)
B: P16.2 R31.1 | length 24.5
  Top Layer w0.3: R31.1@65.129,83.718 65.129,82.867 67.073,80.923 v1(67.166,80.923)
  Layer 4 w0.3: v1(67.166,80.923) 81.393,80.923 v1(82.958,82.488)
  Bottom Layer w0.3: P16.2@80.039,84.848 81.397,84.848 81.552,84.692 82.958,83.286 v1(82.958,82.488)
C: P17.2 R32.1 | length 138.6
  Top Layer w0.3: R32.1@65.129,164.94 65.129,163.859 66.164,162.823 v1(74.743,162.823)
  Layer 3 w0.3: v1(74.743,162.823) 106.159,162.823 v1(122.13,146.852)
  Layer 4 w0.3: v1(122.13,146.852) 142.338,126.645 142.338,91.493 v1(137.591,86.747)
  Bottom Layer w0.3: v1(137.591,86.747) 137.611,86.747 138.567,85.791 138.575,85.791 P17.2@139.757,84.609
D: P18.2 R33.1 | length 131.9
  Top Layer w0.3: v1(51.29,82.541) 51.599,82.541 51.925,82.867 R33.1@51.925,83.718 ; v1(77.82,107.032) 77.82,129 91.586,142.767 130.049,142.767 v1(138.363,134.453)
  Bottom Layer w0.3: v1(51.29,82.541) 53.328,82.541 v1(77.82,107.032) ; v1(138.363,134.453) 138.375,134.44 139.075,134.44 139.861,135.227 P18.2@139.962,135.227
EN: R4.1 U1.11 U4.2 U14.2 | length 142.8
  Top Layer w0.3: R4.1@51.925,118.528 v1(51.925,120.269) ; U4.2@100.691,179.009 103.419,179.009 v1(104.399,178.029) ; U14.2@113.357,179.004 114.641,179.004 v1(114.884,179.248) ; 132.294,184.084 U1.11@133.753,184.084
  Layer 3 w0.3: v1(93.497,175.108) 110.744,175.108 113.665,178.029 ; v1(104.399,178.029) 113.665,178.029 ; v1(114.884,179.248) 113.665,178.029 ; 132.294,184.084 132.283,184.074 132.283,175.514 131.877,175.108 115.087,175.108 113.665,176.53 113.665,178.029
  Layer 4 w0.3: v1(51.925,120.269) 51.925,133.536 v1(93.497,175.108)